# EAGLE board TAStm32 (EAGLE 9.1.3)
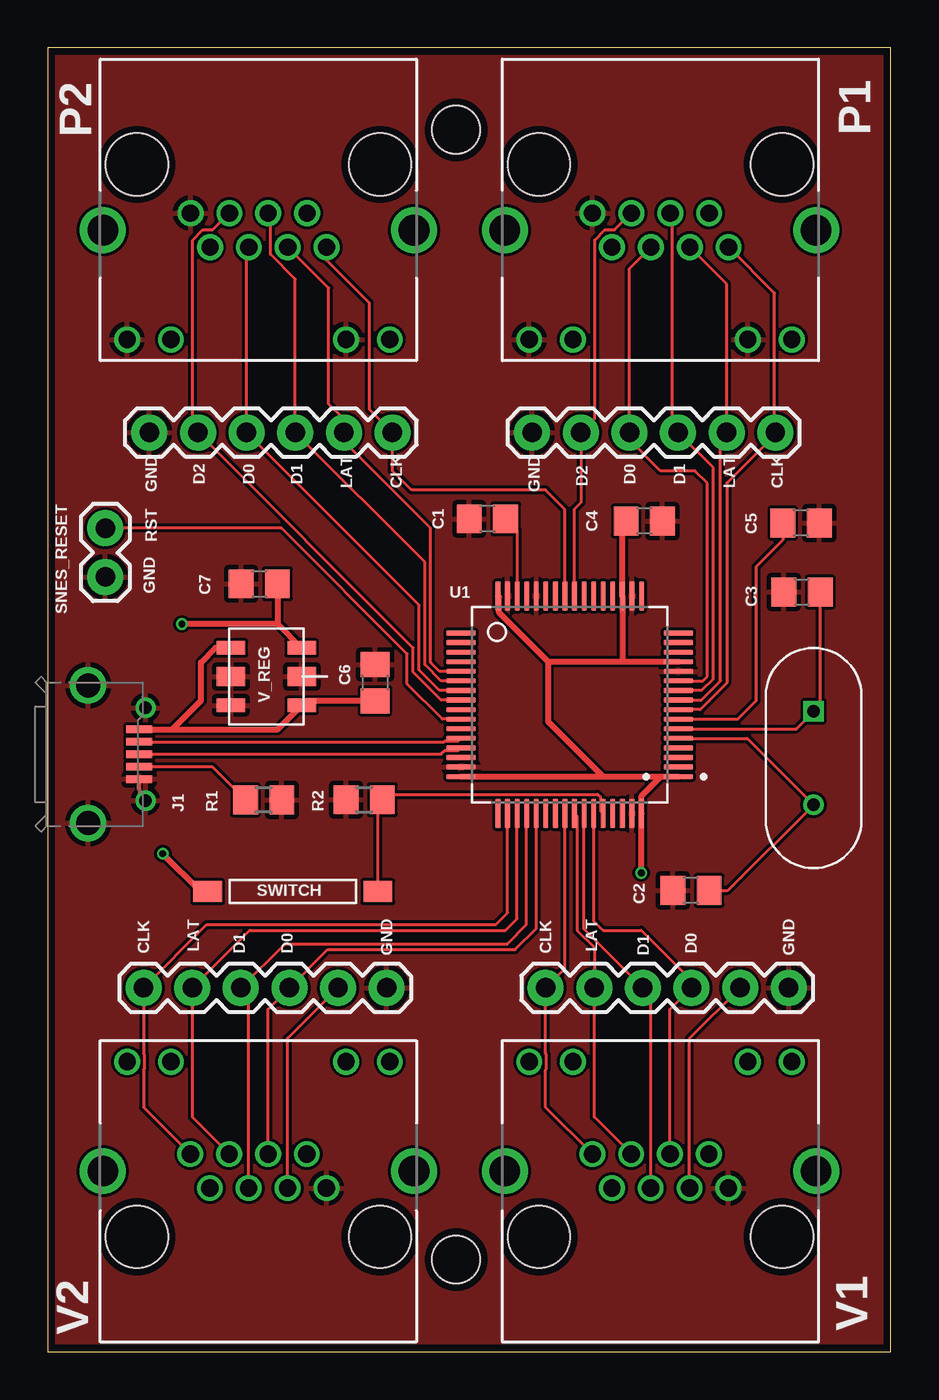
[diagram p0: board, top side]
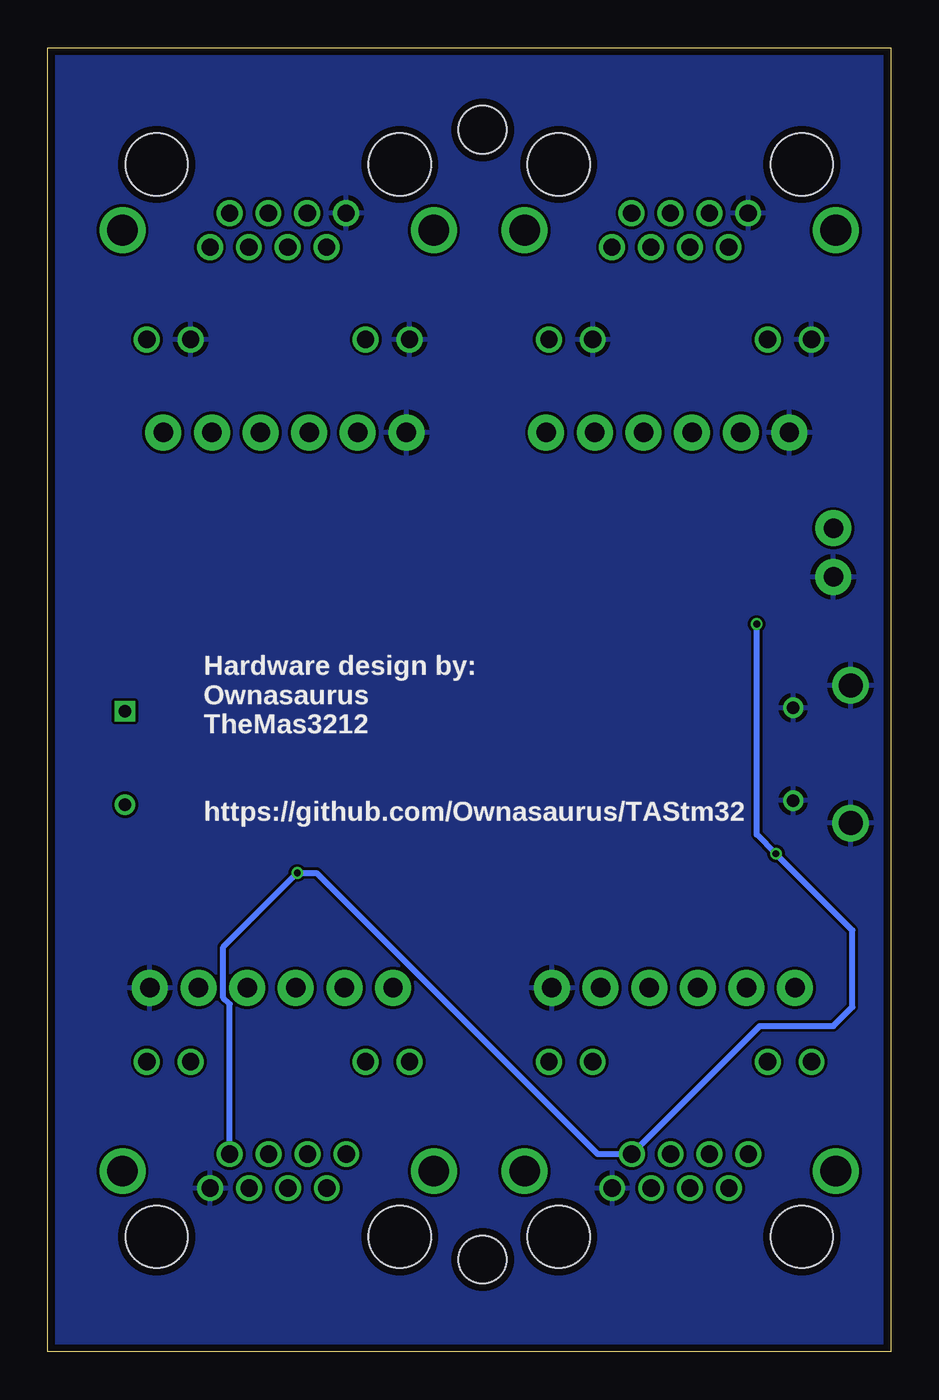
[diagram p1: board, bottom side, seen from below]

Size 44.03 x 68.09 mm. Coordinates in mm from the lower left corner, seen from the top.
Outline: 0,0 44.03,0 44.03,68.09 0,68.09 0,0
Copper layers (1*16): Top 0.035559375mm / dielectric 1.6mm / Bottom 0.035559375mm
Design rules "oshpark-2layer *": minimum track width 6mil, minimum drill 10mil, track to track 6mil, track to pad 6mil, pad to pad 6mil, via to via 6mil, smd to smd 6mil, copper to edge 15mil, drill to drill 6mil, minimum pad ring 5mil, minimum via ring 5mil, stop-mask expansion 2.5mil, vias tented up to drill 25mil, thermal gap 10mil
Holes 2.5 mm at 21.32,4.81 21.32,63.81

## Footprints (pad centres in the part's own frame; a part is rotated, then mirrored left to right if it is on the bottom)
XTAL_HC49P488W45L1150T500H350 = drill 0.66 pad 1.06 square: 1 -2.44,0 | drill 0.66 pad 1.06: 2 2.44,0
C0805 = smd 1.3 x 1.5: 1 -0.95,0; 2 0.95,0
HIROSE_ZX62D-B-5PA8 = smd 1.35 x 0.4: 1 2.675,1.3; 2 2.675,0.65; 3 2.675,0; 4 2.675,-0.65; 5 2.675,-1.3 | drill 0.65 pad 1.05: S7 3,2.425; S8 3,-2.425 | drill 1.25 pad 1.9: S9 0,3.6; S10 0,-3.6
AMPHENOL_RJHSE-5381 = drill 0.9: 1 3.55,2.54; 2 2.53,4.32; 3 1.52,2.54; 4 0.5,4.32; 5 -0.51,2.54; 6 -1.53,4.32; 7 -2.54,2.54; 8 -3.56,4.32; 9 6.86,9.14; 10 4.57,9.14; 11 -4.57,9.14; 12 -6.86,9.14 | drill 1.6: S1 8.13,3.43; S2 -8.13,3.43 | hole 3.25: 6.35,0; -6.35,0
FTDI_BASIC = drill 1.016 pad 1.88: CTS 10.16,0; DTR 0,0; GND 12.7,0; RXI 2.54,0; TXO 5.08,0; VCC 7.62,0
R0805 = smd 1.3 x 1.5: 1 -0.95,0; 2 0.95,0
1X02 = drill 1.016 pad 1.88: 1 0,0; 2 2.54,0
DM01 = smd 1.1 x 1.5: P$1 0,4.45; P$2 0,-4.45
QFP50P1200X1200X160-64N = smd 1.56 x 0.28: 1 -5.68,3.75; 2 -5.68,3.25; 3 -5.68,2.75; 4 -5.68,2.25; 5 -5.68,1.75; 6 -5.68,1.25; 7 -5.68,0.75; 8 -5.68,0.25; 9 -5.68,-0.25; 10 -5.68,-0.75; 11 -5.68,-1.25; 12 -5.68,-1.75; 13 -5.68,-2.25; 14 -5.68,-2.75; 15 -5.68,-3.25; 16 -5.68,-3.75; 33 5.68,-3.75; 34 5.68,-3.25; 35 5.68,-2.75; 36 5.68,-2.25; 37 5.68,-1.75; 38 5.68,-1.25; 39 5.68,-0.75; 40 5.68,-0.25; 41 5.68,0.25; 42 5.68,0.75; 43 5.68,1.25; 44 5.68,1.75; 45 5.68,2.25; 46 5.68,2.75; 47 5.68,3.25; 48 5.68,3.75 | smd 0.28 x 1.56: 17 -3.75,-5.68; 18 -3.25,-5.68; 19 -2.75,-5.68; 20 -2.25,-5.68; 21 -1.75,-5.68; 22 -1.25,-5.68; 23 -0.75,-5.68; 24 -0.25,-5.68; 25 0.25,-5.68; 26 0.75,-5.68; 27 1.25,-5.68; 28 1.75,-5.68; 29 2.25,-5.68; 30 2.75,-5.68; 31 3.25,-5.68; 32 3.75,-5.68; 49 3.75,5.68; 50 3.25,5.68; 51 2.75,5.68; 52 2.25,5.68; 53 1.75,5.68; 54 1.25,5.68; 55 0.75,5.68; 56 0.25,5.68; 57 -0.25,5.68; 58 -0.75,5.68; 59 -1.25,5.68; 60 -1.75,5.68; 61 -2.25,5.68; 62 -2.75,5.68; 63 -3.25,5.68; 64 -3.75,5.68
S-1172B33-U5T1G = smd 0.7 x 1.5: EN -1.5,-1.85; GND3 1.5,-1.85; VIN 1.5,1.85; VOUT -1.5,1.85 | smd 1 x 1.5: GND 0,-1.85; GND2 0,1.85

## Placement (x,y rotation side)
8MHZ_XTAL  XTAL_HC49  [XTAL_HC49P488W45L1150T500H350]  40,31 270 top
C1  4.7uF  [C0805]  22.96,43.49 180 top
C2  25pF  [C0805]  33.59,24.09 180 top
C3  25pF  [C0805]  39.39,39.67 0 top
C4  100nF  [C0805]  31.16,43.38 180 top
C5  100nF  [C0805]  39.34,43.27 180 top
C6  100nF  [C0805]  17.09,34.94 270 top
C7  100nF  [C0805]  11.04,40.1 0 top
J1  ZX62D-B-5PA8  [HIROSE_ZX62D-B-5PA8]  2.1,31.2 0 top
P1  RJHSE-5381  [AMPHENOL_RJHSE-5381]  32,62 180 top
P1_DEBUG  6_PIN_SERIAL_CABLEPTH  [FTDI_BASIC]  38,48 180 top
P2  RJHSE-5381  [AMPHENOL_RJHSE-5381]  11,62 180 top
P2_DEBUG  6_PIN_SERIAL_CABLEPTH  [FTDI_BASIC]  18,48 180 top
R1  100k  [R0805]  11.27,28.81 180 top
R2  10k  [R0805]  16.52,28.83 0 top
SNES_RESET  1  [1X02]  3,43 270 top
SWITCH  DM01  [DM01]  12.79,24.03 90 top
U1  STM32F446RET6  [QFP50P1200X1200X160-64N]  27.26,33.78 180 top
V1  RJHSE-5381  [AMPHENOL_RJHSE-5381]  32,6 0 top
V1_DEBUG  6_PIN_SERIAL_CABLEPTH  [FTDI_BASIC]  26,19 0 top
V2  RJHSE-5381  [AMPHENOL_RJHSE-5381]  11,6 0 top
V2_DEBUG  6_PIN_SERIAL_CABLEPTH  [FTDI_BASIC]  5,19 0 top
V_REG  S-1172B33-U5T1G  [S-1172B33-U5T1G]  11.41,35.25 270 top

## Library data of the parts
8MHZ_XTAL = XTAL_HC49P488W45L1150T500H350
C1-C7 = eagle-ltspice; SPICEMODEL: NONE; SPICEPREFIX: C
J1 = ZX62D-B-5PA8; AVAILABILITY: Unavailable; DESCRIPTION: 5 Pin Single Port USB 2.0 Micro B Bottom Mount Through Hole Receptacle Male; MF: Hirose; MP: ZX62D-B-5PA8; PACKAGE: None; PRICE: None
P1 P2 V1 V2 = RJHSE-5381; AVAILABILITY: Unavailable; DESCRIPTION: connector, mod jack, rt angle pcb, shielded, led1-g, led2-y, single port, rj-45 8 cont; MF: Amphenol ICC; MP: RJHSE-5381; PACKAGE: None; PRICE: None
P1_DEBUG P2_DEBUG SNES_RESET V1_DEBUG V2_DEBUG = SparkFun-Connectors
R1 R2 = rcl; SPICEPREFIX: R
SWITCH = DM01
U1 = STM32F446RET6; DESCRIPTION: MCU 32-Bit STM32 ARM Cortex M4 RISC 512KB Flash 2.5V/3.3V 64-Pin LQFP Tray; MF: STMicroelectronics; MP: STM32F446RET6; PACKAGE: LQFP-64 STMicroelectronics
V_REG = S-1172B33-U5T1G

## Nets
3V3: C4.2 C7.2 SWITCH.P$1 U1.1 U1.13 U1.19 U1.32 U1.48 U1.64 V1.2 V2.2 V_REG.VOUT
+5V: C6.2 J1.1 V_REG.EN V_REG.VIN
DM: J1.2 U1.44
DP: J1.3 U1.45
GND: C1.2 C2.2 C3.1 C4.1 C5.1 C6.1 C7.1 J1.5 J1.S7 J1.S8 J1.S9 J1.S10 P1.1 P1.9 P1.11 P1_DEBUG.GND P2.1 P2.9 P2.11 P2_DEBUG.GND R1.1 R2.1 SNES_RESET.2 U1.12 U1.18 U1.28 U1.31 U1.47 U1.63 V1.1 V1_DEBUG.GND V2.1 V2_DEBUG.GND V_REG.GND V_REG.GND2 V_REG.GND3
N$3: R2.2 SWITCH.P$2 U1.60
N$4: C5.2 U1.7
N$6: C1.1 U1.30
N$15: J1.4 R1.2
P1_5V: P1.2
P1_CLOCK: P1.8 P1_DEBUG.DTR U1.8
P1_D0: P1.4 P1_DEBUG.VCC U1.11
P1_D1: P1.5 P1_DEBUG.TXO U1.10
P1_D2: P1.3 P1_DEBUG.CTS U1.24
P1_LATCH: P1.6 P1_DEBUG.RXI U1.9
P1_NC: P1.7
P2_5V: P2.2
P2_CLOCK: P2.8 P2_DEBUG.DTR U1.25
P2_D0: P2.4 P2_DEBUG.VCC U1.39
P2_D1: P2.5 P2_DEBUG.TXO U1.38
P2_D2: P2.3 P2_DEBUG.CTS U1.40
P2_LATCH: P2.6 P2_DEBUG.RXI U1.37
P2_NC: P2.7
SNES_RESET: SNES_RESET.1 U1.42
V1_CLOCK: U1.56 V1.8 V1_DEBUG.DTR
V1_D0: U1.59 V1.4 V1_DEBUG.VCC
V1_D1: U1.58 V1.5 V1_DEBUG.TXO
V1_LATCH: U1.57 V1.6 V1_DEBUG.RXI
V1_NC: V1.7
V1_NC2: V1.3 V1_DEBUG.CTS
V2_CLOCK: U1.50 V2.8 V2_DEBUG.DTR
V2_D0: U1.53 V2.4 V2_DEBUG.VCC
V2_D1: U1.52 V2.5 V2_DEBUG.TXO
V2_LATCH: U1.51 V2.6 V2_DEBUG.RXI
V2_NC: V2.7
V2_NC2: V2.3 V2_DEBUG.CTS
XTAL1: 8MHZ_XTAL.2 C2.1 U1.5
XTAL2: 8MHZ_XTAL.1 C3.2 U1.6

## Tracks (layer width: path | path; a pad name or v marks a point on that pad's centre or on a via)
3V3  (via drill 0.35)
  Top 0.305: C7.2 11.99,38.02 | 11.99,38.02 V_REG.VOUT | v6,26 7.97,24.03 SWITCH.P$1 | v7,38 7.02,38.02 11.99,38.02 | 23.57,38.59 23.58,38.58 | 23.58,38.58 26.13,36.03 | 26.13,36.03 30,36.03 | 30,36.03 U1.13 | 30,36.03 U1.19 30.01,43.18 C4.2 | 32.03,30.03 U1.1 | 32.03,30.03 31.01,29.01 U1.64 v31,25 | U1.48 29,30.03 | 29,30.03 32.03,30.03 | 26.13,36.03 26.13,32.9 29,30.03 | 23.58,38.58 23.57,38.59 | 23.57,38.59 23.57,39.41 U1.32
  Bottom 0.305: v7,38 7,27 v6,26 2,22 2,18 3,17 6.85,17 V2.2 15.32,10.32 30,25 v31,25 34.87,21.14 34.87,18.48 34.53,18.15 V1.2
+5V
  Top 0.305: 6.5,32.5 8,34 8,36 8.75,36.75 V_REG.EN | 6.5,32.5 12.01,32.5 V_REG.VIN 13.5,33.99 C6.2 | J1.1 6.5,32.5
DM
  Top 0.152: J1.2 20.7,31.85 20.75,31.9 21.45,31.9 U1.44
DP
  Top 0.152: U1.45 21.45,31.4 20.75,31.4 20.55,31.2 J1.3
GND
  Top 0.152: J1.5 4.78,29.1 J1.S8
  pour Bottom: 0,68.1 44.36,68.1 44.36,0 0,0
  pour Top: 0,68 44,68 44,0 0,0
N$3
  Top 0.152: U1.60 28.88,28.23 28.88,28.93 28.7,29.11 17.75,29.11 R2.2 17.24,28.6 SWITCH.P$2
N$4
  Top 0.152: U1.7 36.03,33.03 37,34 37,41 38.39,42.39 C5.2
N$6
  Top 0.152: C1.1 24.51,42.89 U1.30
N$15
  Top 0.152: J1.4 8.58,30.55 R1.2
P1_CLOCK
  Top 0.152: P1.8 37.96,55.28 37.96,48.04 P1_DEBUG.DTR 38,47.9 35.47,45.37 35.47,34.92 34.07,33.53 U1.8
P1_D0
  Top 0.152: P1.4 30.38,56.56 P1_DEBUG.VCC 30.38,47.62 32,46 33.8,46 34.45,45.35 34.45,35.27 34.21,35.03 U1.11
P1_D1
  Top 0.152: P1.5 32.63,59.34 32.63,48.29 P1_DEBUG.TXO 34.75,46.17 34.75,35.14 34.14,34.53 U1.10
P1_D2
  Top 0.152: P1.3 29.6,58.58 29.1,58.58 28.57,58.05 28.57,48.72 P1_DEBUG.CTS 27.84,44.34 27.51,44.01 U1.24
P1_LATCH
  Top 0.152: P1.6 35.46,55.75 P1_DEBUG.RXI 35.13,47.67 35.13,35.03 34.13,34.03 U1.9
P2_CLOCK
  Top 0.152: U1.25 27.01,43.99 26,45 19,45 18,46 P2_DEBUG.DTR 16.8,49.2 16.8,54.76 14.56,57 P2.8
P2_D0
  Top 0.152: P2.4 10.38,57.56 P2_DEBUG.VCC 19.39,38.99 19.39,35.61 20.47,34.53 U1.39
P2_D1
  Top 0.152: P2.5 11.63,59.34 11.63,57.31 12.92,56.01 P2_DEBUG.TXO 19.7,41.23 19.7,35.87 20.54,35.03 U1.38
P2_D2
  Top 0.152: P2.3 8.6,58.58 8.1,58.58 7.57,58.05 7.57,48.27 P2_DEBUG.CTS 19.09,36.75 19.09,35.48 20.54,34.03 U1.40
P2_LATCH
  Top 0.152: P2.6 14.67,55.54 14.67,49.49 15.46,48.69 P2_DEBUG.RXI 15.46,47.54 20,43 20,36 20.47,35.53 U1.37
SNES_RESET
  Top 0.152: U1.42 20.6,33.03 18.77,34.86 18.77,36.44 12.2,43 SNES_RESET.1
V1_CLOCK
  Top 0.152: V1.8 26,12.76 26,14.72 26.04,14.77 26.04,15.51 26,15.56 V1_DEBUG.DTR 27.01,20.01 U1.56
V1_D0
  Top 0.152: V1.4 32.5,17.88 V1_DEBUG.VCC 33.62,19.38 31,22 29,22 28.51,22.49 U1.59
V1_D1
  Top 0.152: V1.5 31.49,18.59 V1_DEBUG.TXO 28.01,22.07 U1.58
V1_LATCH
  Top 0.152: V1.6 28.54,12.25 V1_DEBUG.RXI 28.54,21.11 27.64,22.01 27.64,27.97 U1.57
V1_NC2
  Top 0.152: V1.3 33.52,16.36 V1_DEBUG.CTS
V2_CLOCK
  Top 0.152: V2.8 5,12.76 5,14.72 5.04,14.77 5.04,15.51 5,15.56 V2_DEBUG.DTR 8.3,22.3 23.4,22.3 24.01,22.91 U1.50
V2_D0
  Top 0.152: V2.4 11.5,17.88 V2_DEBUG.VCC 14.62,21 24.4,21 25.51,22.11 U1.53
V2_D1
  Top 0.152: V2.5 10.49,18.59 V2_DEBUG.TXO 12.38,21.3 24,21.3 25,22.3 U1.52
V2_LATCH
  Top 0.152: V2.6 7.54,12.25 V2_DEBUG.RXI 10.54,22 23.9,22 24.51,22.61 U1.51
V2_NC2
  Top 0.152: V2.3 12.52,16.36 V2_DEBUG.CTS
XTAL1
  Top 0.152: C2.1 35.53,24.09 8MHZ_XTAL.2 36.53,32.03 U1.5
XTAL2
  Top 0.152: C3.2 40.34,33.78 8MHZ_XTAL.1 39.09,32.53 U1.6

## Text on the board
tNames: GND | D2 | D0 | D1 | LAT | CLK | GND | D2 | D0 | D1 | LAT | CLK | RST | GND | V_REG | SWITCH | CLK | LAT | D1 | D0 | GND | CLK | LAT | D1 | D0 | GND
bNames: Hardware design by: / Ownasaurus / TheMas3212 / / / https://github.com/Ownasaurus/TAStm32